# Altium PCB g75_c2g4a12s3a.pcbdoc
Units mm, origin at the board's own origin, x right, y up, seen from the top; angles counter-clockwise.
Board outline 45.43 x 39.78 mm, 2 copper layers (Top Layer, Bottom Layer); 1 components, 4 nets, 16 pads, 0 vias.
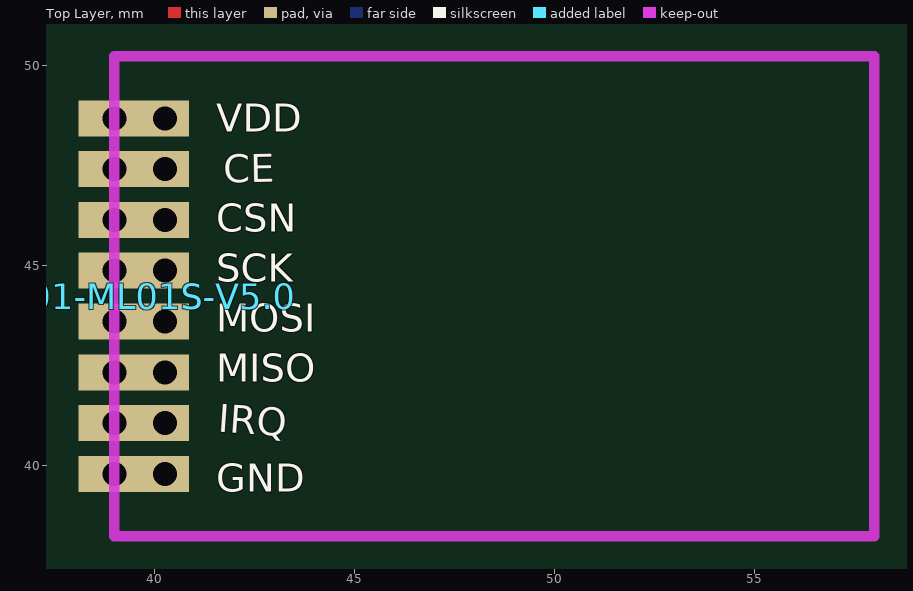
[diagram p0: Top Layer view]
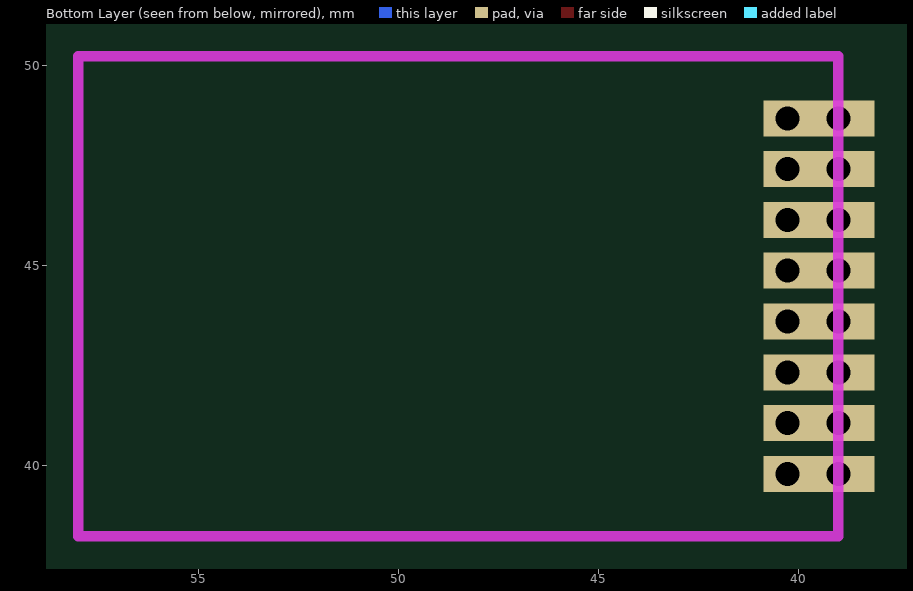
[diagram p1: Bottom Layer view, seen from below]

## Layer stack, top to bottom
Top Layer: signal copper (thickness not stored)
Dielectric: dielectric 0.32, FR-4, Dk 4.8
Bottom Layer: signal copper (thickness not stored)

## Board outline
70.827,25.4 25.4,25.4 25.4,65.177 70.827,65.177

## Components (designator, comment, footprint, x,y, rotation, side; value= is the part's Value field where it differs from the comment)
AS01-ML01S-V5.0 "CON8-2X1.27MM" CON8-2X1.27MM 39,48.677 r0 top

## Footprints (in the part's own frame and the unit in brackets; to place one, negate y for a bottom-side part, rotate by r counter-clockwise, add the part's x,y. Pads: shape width x height; smd on the part's side, far side on the other; paste and mask are expansions set on the pad)
CON8-2X1.27MM [mm]
  rect 1.8x0.9 hole 0.6: 1(0,0) 2(0,-1.27) 3(0,-2.54) 4(0,-3.81) 5(0,-5.08) 6(0,-6.35) 7(0,-7.62) 8(0,-8.89)
  rect 1.2x0.9 hole 0.6: 1(1.27,0) 2(1.27,-1.27) 3(1.27,-2.54) 4(1.27,-3.81) 5(1.27,-5.08) 6(1.27,-6.35) 7(1.27,-7.62) 8(1.27,-8.89)

## Nets (pads, with @x,y where several pads share a name; then routed paths per layer and width w, separated by ;. In a path a pad name is that pad's centre, name@x,y a point inside that pad or via, vN(x,y) a via of type N, cw(c..) or ccw(c..) an arc to the next point about the centre after c; other vN are vias at no path point)
S$50: 
S$52: 
S$56: 
S$58: 
pads on no net: AS01-ML01S-V5.0.1 AS01-ML01S-V5.0.2 AS01-ML01S-V5.0.3 AS01-ML01S-V5.0.4 AS01-ML01S-V5.0.5 AS01-ML01S-V5.0.6 AS01-ML01S-V5.0.7 AS01-ML01S-V5.0.8

## Silkscreen, mask and mechanical layers (free items; w line width, h text height)
Top Overlay:
  text "VDD" at 41.55,48.102 h1.2
  text "CE" at 41.739,46.833 h1.2 r1
  text "CSN" at 41.55,45.606 h1.2
  text "SCK" at 41.55,44.354 h1.2
  text "MOSI" at 41.55,43.103 h1.2
  text "MISO" at 41.55,41.851 h1.2
  text "IRQ" at 41.559,40.599 h1.2 r356
  text "GND" at 41.55,39.102 h1.2
Document:
  lines w0.003: 48.088,45.263 48.139,45.314